# Altium PCB PCB_v1.0.PcbDoc (part 2 of 2)
Units mil, origin at the board's own origin, x right, y up, seen from the top; angles counter-clockwise.
Board outline 6380 x 3360 mil, 2 copper layers (Top Layer, Bottom Layer); 138 components, 156 nets, 538 pads, 20 vias.
Unrouted connection lines stored in the file: 3.
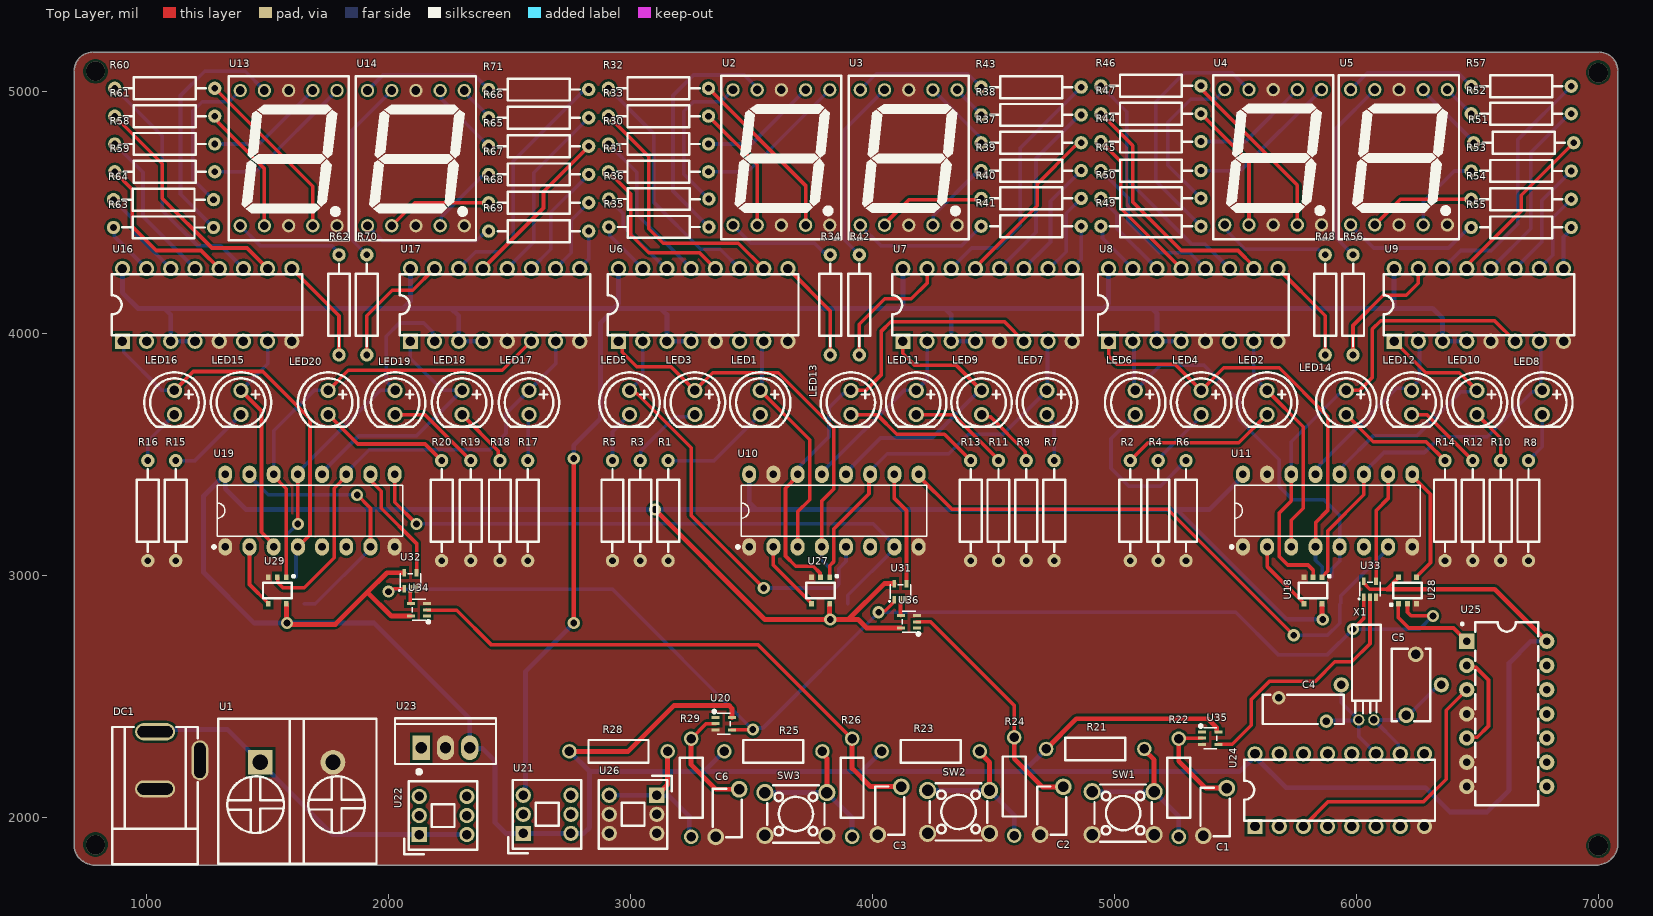
[diagram p0: Top Layer view]

## Via types
v1: diameter 50, hole 28, Top Layer to Bottom Layer, 16 vias
v2: diameter 80, hole 80, Top Layer to Bottom Layer, 4 vias

## Nets (pads, with @x,y where several pads share a name; then routed paths per layer and width w, separated by ;. In a path a pad name is that pad's centre, name@x,y a point inside that pad or via, vN(x,y) a via of type N, cw(c..) or ccw(c..) an arc to the next point about the centre after c; other vN are vias at no path point) (continued)
NetR67_2: (continued)
  Bottom Layer w15: U14.4 2217.82,4451.82 2217.82,4482.82 2386.32,4651.32 2405.63,4651.32 R67.2
NetR68_1: R68.1 U17.10 | length 328.6
  Bottom Layer w15: U17.10 2755,4335 2755,4470.31 R68.1
NetR68_2: R68.2 U14.2 | length 439.8
  Top Layer w15: U14.2 2108,4542 R68.2
NetR69_1: R69.1 U17.9 | length 170.2
  Bottom Layer w15: U17.9 2789.99,4272.97 2826.69,4309.67 R69.1
NetR69_2: R69.2 U14.1 | length 542.6
  Bottom Layer w15: U14.1 1974.84,4385 2362.45,4385 2402.45,4425 R69.2
NetR70_1: R70.1 U17.15 | length 522.5
  Top Layer w15: R70.1 1910,4075 2015,4180 2099.98,4180 U17.15
NetR70_2: R70.2 U14.9 | length 771.6
  Bottom Layer w15: R70.2 1850,4386.69 1850,4843 U14.9
NetR71_1: R71.1 U17.14 | length 1030.7
  Bottom Layer w15: U17.14 2360,4340 2460,4340 2515,4395 2515,4715 2797.95,4997.95 2803.78,4997.95 2815.83,5010 R71.1
NetR71_2: R71.2 U14.10 | length 551.8
  Bottom Layer w15: U14.10 1977,5070 2353.31,5070 R71.2
NetU20_4: U20.4 U28.2 U31.1 U32.1 U33.1 | length 5441.7
  Top Layer w15: v1(2000,2935) 2009.47,2935 2021.04,2946.57 U32.1 ; U20.4 3418.53,2364.7 3504.7,2364.7 v1(3505,2365) ; v1(4025,2850) 4031.7,2856.7 4052.37,2856.7 4089.41,2893.74 U31.1 ; v1(5985,2780) 6029.41,2824.41 U33.1 ; U28.2 6210,2850 6225,2835 v1(6315,2835)
  Bottom Layer w15: v1(2000,2935) 2006.7,2941.7 2022.98,2941.7 2026.29,2945 2925,2945 v1(3505,2365) 3511.7,2371.7 3546.7,2371.7 v1(4025,2850) 5500,2850 5675,2675 5880,2675 v1(5985,2780) 6260,2780 v1(6315,2835)
NetU22_2: U22.2 U22.3 U22.5 U22.6 U23.1
NetU24_3: U24.3 U25.3 | length 1076
  Top Layer w15: U24.3 5881.61,2066.61 6276.61,2066.61 6370,2160 6370,2445 U25.3
NetU25_1: U25.1 U28.1 | length 380.2
  Top Layer w15: U28.1 6172.6,2827.4 6215,2785 6400,2785 6431,2754 U25.1
NetU25_2: U25.2 U25.5 | length 415.6
  Top Layer w15: U25.5 6458.49,2333.49 6498.49,2333.49 6545,2380 6545,2570 6493.23,2621.77 6463.23,2621.77 U25.2
NetU31_2: U31.2 U36.4 | length 67
  Top Layer w15: U31.2 4115,2836.89 4116.3,2835.59 U36.4
NetU32_2: U32.2 U34.4 | length 62
  Top Layer w15: U32.2 2090,2886.89 2091.3,2885.59 U34.4
NetU33_2: U33.2 U35.4 | length 1052.9
  Top Layer w15: U35.4 5485.93,2304.41 5564.83,2383.31 5564.83,2489.83 5640,2565 5830,2565 5910,2645 5980,2645 6055,2720 U33.2
pads on no net: U6.6 U8.6 U10.6 U11.6 U16.2 U16.6 U19.5 U19.6 U20.1 U24.1 U24.2 U24.4 U24.5 U24.6 U24.7 U24.9 U24.12 U24.13 U24.14 U24.15 U25.8 U25.9 U25.10 U25.11 U25.12 U25.13 U34.1 U35.1 U36.1
copper on no net:
  other v2: 6998.74,1885 788.74,1889.97 6998.74,5079.97 788.74,5084.93

## Polygon pours and split planes (outlines as drawn)
GND on Bottom Layer "GND_L02_P004" (solid, pour order 4): 785,1805 6990,1805 ccw(c6990,1895) 7080,1895 7080,5085 ccw(c7000.01,5085.01) 7000,5165 780,5165 ccw(c780,5085) 700,5085 700,1890 ccw(c785,1890)
+D5V on Bottom Layer "NONET_L-01_P-001" (solid, pour order 3): 2540,2140 2540,2135 2540,1990 2755,1990 2780,2015 2780,2140
NetU22_2 on Bottom Layer "NONET_L-01_P-001" (solid, pour order 2): 2090,2340 2090,1990 2360,1990 2360,2120 2205,2120 2165,2160 2165,2340
10H2 on Bottom Layer "10H2_L02_P001" (solid, pour order 1): 830,1805 6925,1805 6925,5165 830,5165
GND on Top Layer "GND_L01_P005" (solid, remove dead copper, pour order 5): 785,1805 6990,1805 ccw(c6990,1895) 7080,1895 7080,5085 ccw(c7000.01,5085.01) 7000,5165 780,5165 ccw(c780,5085) 700,5085 700,1890 ccw(c785,1890)

## Silkscreen, mask and mechanical layers (free items; w line width, h text height)
Mechanical 15:
  lines w10: 835,4390 6920,4390 6920,5075 835,5075 835,4390